# EAGLE board Motor Driver 6 Element (EAGLE 6.0)
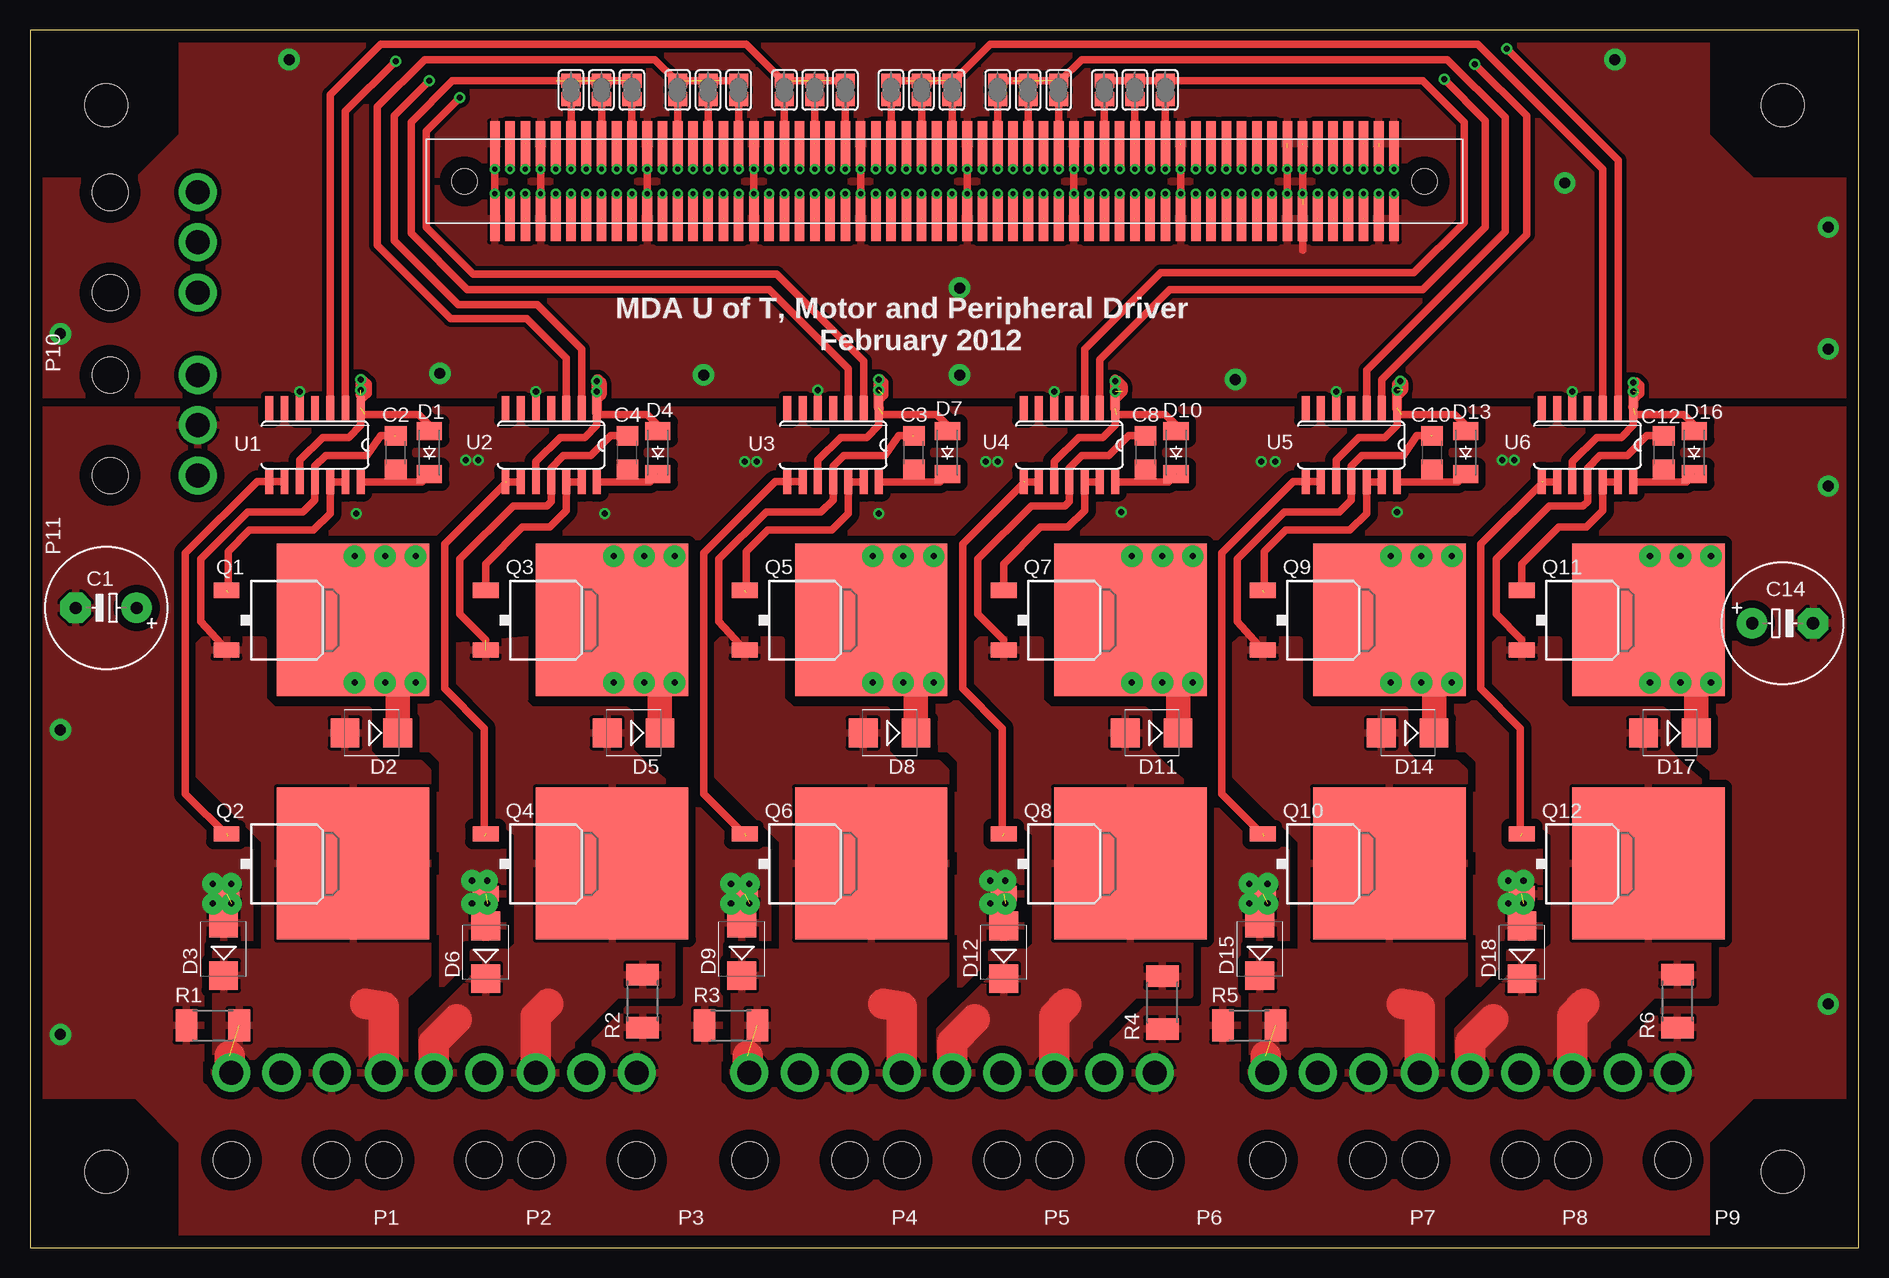
[diagram p0: board, top side]
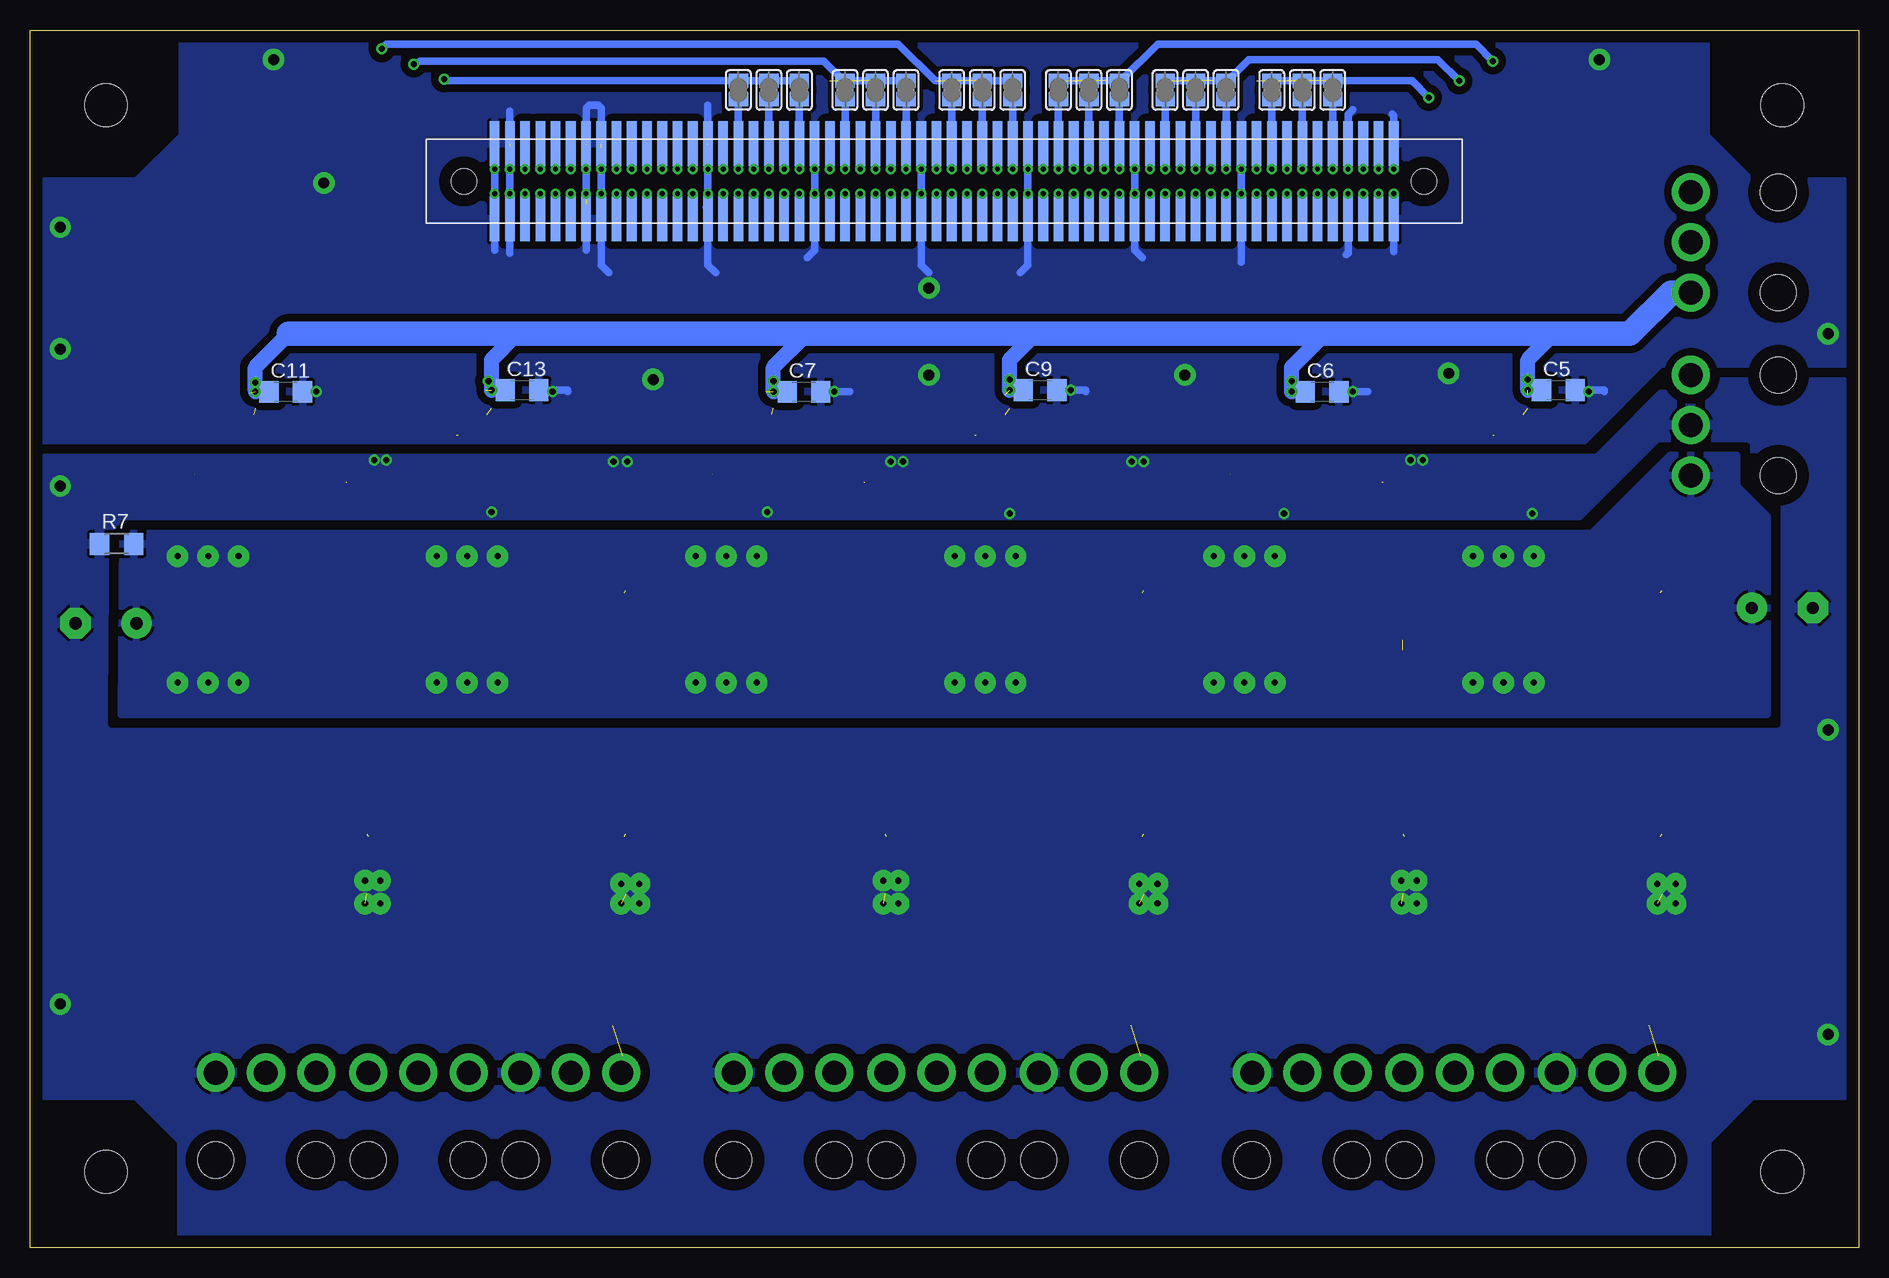
[diagram p1: board, bottom side, seen from below]

Size 152.38 x 101.52 mm. Coordinates in mm from the lower left corner, seen from the top.
Outline: 0,0 152.38,0 152.38,101.52 0,101.52 0,0
Copper layers (1*16): Top 0.035mm / dielectric 1.5mm / Bottom 0.035mm
Design rules: minimum track width 10mil, minimum drill 24mil, track to track 8mil, track to pad 8mil, pad to pad 8mil, via to via 8mil, smd to smd 12mil, copper to edge 40mil, drill to drill 8mil, minimum pad ring 10mil, minimum via ring 8mil, stop-mask expansion 4mil, vias tented up to drill 0mil, thermal gap 10mil
Holes 3.56 mm at 6.35,6.35 6.35,95.25 146.05,95.25 146.05,6.35

## Footprints (pad centres in the part's own frame; a part is rotated, then mirrored left to right if it is on the bottom)
E5-10,5 = drill 1.016 pad 2.54: + -2.54,0 | drill 1.016 pad 2.54 octagon: - 2.54,0
C1206 = smd 1.6 x 1.8: 1 -1.4,0; 2 1.4,0
C1206@1 = smd 1.6 x 1.8: 1 -1.4,0; 2 1.4,0
SOD-123_MINI-SMA = smd 1.5 x 2.1: A 1.8,0; C -1.8,0
SMB = smd 2.4 x 2.4: A 2.2,0; C -2.2,0
STACK-CONN-WIDEPITCH = smd 0.8 x 3.75: A1 37.465,-3.125; A2 36.195,-3.125; A3 34.925,-3.125; A4 33.655,-3.125; A5 32.385,-3.125; A6 31.115,-3.125; A7 29.845,-3.125; A8 28.575,-3.125; A9 27.305,-3.125; A10 26.035,-3.125; A11 24.765,-3.125; A12 23.495,-3.125; A13 22.225,-3.125; A14 20.955,-3.125; A15 19.685,-3.125; A16 18.415,-3.125; A17 17.145,-3.125; A18 15.875,-3.125; A19 14.605,-3.125; A20 13.335,-3.125; A21 12.065,-3.125; A22 10.795,-3.125; A23 9.525,-3.125; A24 8.255,-3.125; A25 6.985,-3.125; A26 5.715,-3.125; A27 4.445,-3.125; A28 3.175,-3.125; A29 1.905,-3.125; A30 0.635,-3.125; A31 -0.635,-3.125; A32 -1.905,-3.125; A33 -3.175,-3.125; A34 -4.445,-3.125; A35 -5.715,-3.125; A36 -6.985,-3.125; A37 -8.255,-3.125; A38 -9.525,-3.125; A39 -10.795,-3.125; A40 -12.065,-3.125; A41 -13.335,-3.125; A42 -14.605,-3.125; A43 -15.875,-3.125; A44 -17.145,-3.125; A45 -18.415,-3.125; A46 -19.685,-3.125; A47 -20.955,-3.125; A48 -22.225,-3.125; A49 -23.495,-3.125; A50 -24.765,-3.125; A51 -26.035,-3.125; A52 -27.305,-3.125; A53 -28.575,-3.125; A54 -29.845,-3.125; A55 -31.115,-3.125; A56 -32.385,-3.125; A57 -33.655,-3.125; A58 -34.925,-3.125; A59 -36.195,-3.125; A60 -37.465,-3.125; B1 37.465,3.125; B2 36.195,3.125; B3 34.925,3.125; B4 33.655,3.125; B5 32.385,3.125; B6 31.115,3.125; B7 29.845,3.125; B8 28.575,3.125; B9 27.305,3.125; B10 26.035,3.125; B11 24.765,3.125; B12 23.495,3.125; B13 22.225,3.125; B14 20.955,3.125; B15 19.685,3.125; B16 18.415,3.125; B17 17.145,3.125; B18 15.875,3.125; B19 14.605,3.125; B20 13.335,3.125; B21 12.065,3.125; B22 10.795,3.125; B23 9.525,3.125; B24 8.255,3.125; B25 6.985,3.125; B26 5.715,3.125; B27 4.445,3.125; B28 3.175,3.125; B29 1.905,3.125; B30 0.635,3.125; B31 -0.635,3.125; B32 -1.905,3.125; B33 -3.175,3.125; B34 -4.445,3.125; B35 -5.715,3.125; B36 -6.985,3.125; B37 -8.255,3.125; B38 -9.525,3.125; B39 -10.795,3.125; B40 -12.065,3.125; B41 -13.335,3.125; B42 -14.605,3.125; B43 -15.875,3.125; B44 -17.145,3.125; B45 -18.415,3.125; B46 -19.685,3.125; B47 -20.955,3.125; B48 -22.225,3.125; B49 -23.495,3.125; B50 -24.765,3.125; B51 -26.035,3.125; B52 -27.305,3.125; B53 -28.575,3.125; B54 -29.845,3.125; B55 -31.115,3.125; B56 -32.385,3.125; B57 -33.655,3.125; B58 -34.925,3.125; B59 -36.195,3.125; B60 -37.465,3.125 | hole 2.1: -40,0; 40,0
3CKT_MINIFIT_JR = drill 2 pad 3.175: 1 -4.191,0; 2 0,0; 3 4.191,0 | hole 2.997: -4.166,-7.29; 4.191,-7.29
D-PAK_TO252AA = smd 1.27 x 2.159: 1 -2.489,-4.199; 3 2.489,-4.199 | smd 12.7 x 12.7: 4 -0.04,6.35
R2010 = smd 1.8 x 2.7: 1 -2.2,0; 2 2.2,0
R1206 = smd 1.6 x 1.803: 1 -1.422,0; 2 1.422,0
SJ = smd 1.168 x 1.6: 1 -0.762,0; 2 0.762,0
SOIC14 = smd 0.66 x 2.032: 1 -3.81,-3.073; 2 -2.54,-3.073; 3 -1.27,-3.073; 4 0,-3.073; 5 1.27,-3.073; 6 2.54,-3.073; 7 3.81,-3.073; 8 3.81,3.073; 9 2.54,3.073; 10 1.27,3.073; 11 0,3.073; 12 -1.27,3.073; 13 -2.54,3.073; 14 -3.81,3.073

## Placement (x,y rotation side)
C1  >100uF  [E5-10,5]  6.35,53.34 180 top
C2  1uF  [C1206]  30.48,66.29 90 top
C3  1uF  [C1206]  73.66,66.29 90 top
C4  1uF  [C1206]  49.78,66.29 90 top
C5  10uF  [C1206@1]  25.02,71.5 0 bottom
C6  10uF  [C1206@1]  44.7,71.37 0 bottom
C7  10uF  [C1206@1]  87.88,71.37 0 bottom
C8  1uF  [C1206]  92.96,66.29 90 top
C9  10uF  [C1206@1]  68.2,71.5 0 bottom
C10  1uF  [C1206]  116.84,66.29 90 top
C11  10uF  [C1206@1]  131.06,71.37 0 bottom
C12  1uF  [C1206]  136.14,66.29 90 top
C13  10uF  [C1206@1]  111.38,71.5 0 bottom
C14  >100uF  [E5-10,5]  146.05,52.07 0 top
D1  CGRM4001-G  [SOD-123_MINI-SMA]  33.27,66.29 90 top
D2  [SMB]  28.45,42.93 180 top
D3  [SMB]  16.13,24.89 90 top
D4  CGRM4001-G  [SOD-123_MINI-SMA]  52.32,66.29 90 top
D5  [SMB]  50.29,42.93 180 top
D6  [SMB]  37.97,24.64 90 top
D7  CGRM4001-G  [SOD-123_MINI-SMA]  76.45,66.29 90 top
D8  [SMB]  71.63,42.93 180 top
D9  [SMB]  59.31,24.89 90 top
D10  CGRM4001-G  [SOD-123_MINI-SMA]  95.5,66.29 90 top
D11  [SMB]  93.47,42.93 180 top
D12  [SMB]  81.15,24.64 90 top
D13  CGRM4001-G  [SOD-123_MINI-SMA]  119.63,66.29 90 top
D14  [SMB]  114.81,42.93 180 top
D15  [SMB]  102.49,24.89 90 top
D16  CGRM4001-G  [SOD-123_MINI-SMA]  138.68,66.29 90 top
D17  [SMB]  136.65,42.93 180 top
D18  [SMB]  124.33,24.64 90 top
E$1  [STACK-CONN-WIDEPITCH]  76.2,88.9 0 top
E$2  [STACK-CONN-WIDEPITCH]  76.2,88.9 0 bottom
P1  MOLEX_MINIFIT_JR_3CKT  [3CKT_MINIFIT_JR]  20.95,14.61 0 top
P2  MOLEX_MINIFIT_JR_3CKT  [3CKT_MINIFIT_JR]  33.66,14.61 0 top
P3  MOLEX_MINIFIT_JR_3CKT  [3CKT_MINIFIT_JR]  46.35,14.61 0 top
P4  MOLEX_MINIFIT_JR_3CKT  [3CKT_MINIFIT_JR]  64.14,14.61 0 top
P5  MOLEX_MINIFIT_JR_3CKT  [3CKT_MINIFIT_JR]  76.83,14.61 0 top
P6  MOLEX_MINIFIT_JR_3CKT  [3CKT_MINIFIT_JR]  89.53,14.61 0 top
P7  MOLEX_MINIFIT_JR_3CKT  [3CKT_MINIFIT_JR]  107.31,14.61 0 top
P8  MOLEX_MINIFIT_JR_3CKT  [3CKT_MINIFIT_JR]  120.02,14.61 0 top
P9  MOLEX_MINIFIT_JR_3CKT  [3CKT_MINIFIT_JR]  132.72,14.61 0 top
P10  MOLEX_MINIFIT_JR_3CKT  [3CKT_MINIFIT_JR]  13.97,83.82 270 top
P11  MOLEX_MINIFIT_JR_3CKT  [3CKT_MINIFIT_JR]  13.97,68.58 270 top
Q1  IPB70N04S3  [D-PAK_TO252AA]  20.57,52.32 270 top
Q2  IPB70N04S3  [D-PAK_TO252AA]  20.57,32 270 top
Q3  IPB70N04S3  [D-PAK_TO252AA]  42.16,52.32 270 top
Q4  IPB70N04S3  [D-PAK_TO252AA]  42.16,32 270 top
Q5  IPB70N04S3  [D-PAK_TO252AA]  63.75,52.32 270 top
Q6  IPB70N04S3  [D-PAK_TO252AA]  63.75,32 270 top
Q7  IPB70N04S3  [D-PAK_TO252AA]  85.34,52.32 270 top
Q8  IPB70N04S3  [D-PAK_TO252AA]  85.34,32 270 top
Q9  IPB70N04S3  [D-PAK_TO252AA]  106.93,52.32 270 top
Q10  IPB70N04S3  [D-PAK_TO252AA]  106.93,32 270 top
Q11  IPB70N04S3  [D-PAK_TO252AA]  128.52,52.32 270 top
Q12  IPB70N04S3  [D-PAK_TO252AA]  128.52,32 270 top
R1  1.5k  [R2010]  15.24,18.54 0 top
R2  1.5k  [R2010]  51.05,20.57 90 top
R3  1.5k  [R2010]  58.42,18.54 0 top
R4  1.5k  [R2010]  94.36,20.45 90 top
R5  1.5k  [R2010]  101.6,18.54 0 top
R6  1.5k  [R2010]  137.29,20.57 90 top
R7  [R1206]  145.16,58.67 0 bottom
SJ1  [SJ]  61.59,96.52 90 bottom
SJ2  [SJ]  43.81,96.52 90 bottom
SJ3  [SJ]  46.35,96.52 90 bottom
SJ4  [SJ]  48.9,96.52 90 bottom
SJ5  [SJ]  50.16,96.52 90 top
SJ6  [SJ]  47.62,96.52 90 top
SJ7  [SJ]  45.09,96.52 90 top
SJ8  [SJ]  64.14,96.52 90 bottom
SJ9  [SJ]  52.7,96.52 90 bottom
SJ10  [SJ]  55.24,96.52 90 bottom
SJ11  [SJ]  57.78,96.52 90 bottom
SJ12  [SJ]  59.05,96.52 90 top
SJ13  [SJ]  56.52,96.52 90 top
SJ14  [SJ]  53.98,96.52 90 top
SJ15  [SJ]  66.67,96.52 90 bottom
SJ16  [SJ]  67.94,96.52 90 top
SJ17  [SJ]  65.41,96.52 90 top
SJ18  [SJ]  62.87,96.52 90 top
SJ19  [SJ]  90.81,96.52 90 bottom
SJ21  [SJ]  88.27,96.52 90 bottom
SJ22  [SJ]  94.61,96.52 90 top
SJ23  [SJ]  92.08,96.52 90 top
SJ24  [SJ]  89.53,96.52 90 top
SJ25  [SJ]  85.72,96.52 90 top
SJ26  [SJ]  83.19,96.52 90 top
SJ27  [SJ]  80.64,96.52 90 top
SJ28  [SJ]  79.38,96.52 90 bottom
SJ29  [SJ]  81.92,96.52 90 bottom
SJ30  [SJ]  84.45,96.52 90 bottom
SJ31  [SJ]  76.83,96.52 90 top
SJ32  [SJ]  74.3,96.52 90 top
SJ33  [SJ]  71.75,96.52 90 top
SJ34  [SJ]  70.48,96.52 90 bottom
SJ35  [SJ]  73.03,96.52 90 bottom
SJ36  [SJ]  75.56,96.52 90 bottom
SJ37  [SJ]  93.34,96.52 90 bottom
U1  LT1160CS  [SOIC14]  23.75,66.93 180 top
U2  LT1160CS  [SOIC14]  43.43,66.93 180 top
U3  LT1160CS  [SOIC14]  66.93,66.93 180 top
U4  LT1160CS  [SOIC14]  86.61,66.93 180 top
U5  LT1160CS  [SOIC14]  110.11,66.93 180 top
U6  LT1160CS  [SOIC14]  129.79,66.93 180 top

## Library data of the parts
C1-C4 C8 C10 C12 C14 R1-R7 = rcl
C5-C7 C9 C11 C13 = resistor
D1-D18 = diode
E$1 E$2 = interface (2)
P1-P11 Q1-Q12 U1-U6 = Motor Driver Custom
SJ1-SJ19 SJ21-SJ37 = jumper

## Nets
+12V: C5.1 C6.1 C7.1 C9.1 C11.1 C13.1 D1.A D4.A D7.A D10.A D13.A D16.A P10.3 U1.1 U1.10 U2.1 U2.10 U3.1 U3.10 U4.1 U4.10 U5.1 U5.10 U6.1 U6.10
+24V: C1.+ C14.+ P11.3 R7.2
AGND: C1.- C14.- D3.A D6.A D9.A D12.A D15.A D18.A P1.3 P3.3 P4.3 P6.3 P7.3 P9.3 P11.2 Q2.3 Q4.3 Q6.3 Q8.3 Q10.3 Q12.3 R1.1 R2.1 R3.1 R4.1 R5.1 R6.1 R7.1 U1.6 U2.6 U3.6 U4.6 U5.6 U6.6
GND: C5.2 C6.2 C7.2 C9.2 C11.2 C13.2 E$1.A1 E$1.A2 E$1.A7 E$1.A8 E$1.A15 E$1.A22 E$1.A29 E$1.A36 E$1.A43 E$1.A50 E$1.A57 E$1.A60 E$1.B1 E$1.B2 E$1.B7 E$1.B8 E$1.B15 E$1.B22 E$1.B29 E$1.B36 E$1.B43 E$1.B50 E$1.B57 E$1.B60 E$2.A1 E$2.A4 E$2.A11 E$2.A18 E$2.A25 E$2.A32 E$2.A39 E$2.A46 E$2.A53 E$2.A54 E$2.A60 E$2.B1 E$2.B4 E$2.B11 E$2.B18 E$2.B25 E$2.B32 E$2.B39 E$2.B46 E$2.B53 E$2.B54 E$2.B59 E$2.B60 U1.5 U2.5 U3.5 U4.5 U5.5 U6.5
N$1: C2.1 D1.C U1.14
N$2: SJ5.2 SJ6.2 SJ7.2 U3.3
N$3: C3.1 D7.C U3.14
N$5: SJ2.2 SJ3.2 SJ4.2 U3.2
N$6: SJ17.2 SJ18.2 U1.3
N$7: P4.2
N$8: P1.2
N$9: Q1.1 U1.12 U1.13
N$10: Q5.1 U3.12 U3.13
N$11: C8.1 D10.C U4.14
N$12: Q8.1 U4.8 U4.9
N$13: SJ21.2 U4.2
N$14: SJ22.2 SJ23.2 SJ24.2 U4.3
N$15: P6.2
N$16: Q7.1 U4.12 U4.13
N$19: C10.1 D13.C U5.14
N$21: SJ25.2 SJ26.2 SJ27.2 U5.3
N$22: P7.2
N$23: Q9.1 U5.12 U5.13
N$24: C12.1 D16.C U6.14
N$25: Q12.1 U6.8 U6.9
N$27: SJ31.2 SJ32.2 U6.3
N$28: P9.2
N$29: Q11.1 U6.12 U6.13
N$111: C4.1 D4.C U2.14
N$113: Q4.1 U2.8 U2.9
N$114: SJ9.2 SJ10.2 U2.2
N$115: SJ12.2 SJ13.2 SJ14.2 U2.3
N$117: P3.2
N$118: Q3.1 U2.12 U2.13
N$120: SJ1.2 SJ8.2 SJ15.2 U1.2
OUTA: C2.2 D2.A D3.C P1.1 P2.1 Q1.3 Q2.4 R1.2 U1.11
OUTA1: C3.2 D8.A D9.C P4.1 P5.1 Q5.3 Q6.4 R3.2 U3.11
OUTA2: C10.2 D14.A D15.C P7.1 P8.1 Q9.3 Q10.4 R5.2 U5.11
OUTB: C4.2 D5.A D6.C P2.2 P3.1 Q3.3 Q4.4 R2.2 U2.11
OUTB1: C8.2 D11.A D12.C P5.2 P6.1 Q7.3 Q8.4 R4.2 U4.11
OUTB2: C12.2 D17.A D18.C P8.2 P9.1 Q11.3 Q12.4 R6.2 U6.11
S$1: Q3.4
S$2: D5.C
S$3: D2.C
S$4: Q1.4
S$5: E$1.B55 E$2.B6 SJ7.1
S$6: Q2.1 U1.8 U1.9
S$7: Q7.4
S$8: D11.C
S$9: D8.C
S$10: Q5.4
S$11: Q6.1 U3.8 U3.9
S$12: E$1.B53 E$2.B8 SJ6.1
S$13: Q11.4
S$14: D17.C
S$15: D14.C
S$16: Q9.4
S$17: Q10.1 U5.8 U5.9
S$18: E$1.B51 E$2.B10 SJ5.1
S$19: E$1.B48 E$2.B13 SJ14.1
S$20: E$1.B46 E$2.B15 SJ13.1
S$21: E$1.B44 E$2.B17 SJ12.1
S$22: E$1.B41 E$2.B20 SJ18.1
S$23: E$1.B39 E$2.B22 SJ17.1
S$24: E$1.B37 E$2.B24
S$25: E$1.B34 E$2.B27 SJ33.1
S$26: E$1.B32 E$2.B29 SJ32.1
S$27: E$1.B30 E$2.B31 SJ31.1
S$28: E$1.B27 E$2.B34 SJ27.1
S$29: E$1.B25 E$2.B36 SJ26.1
S$30: E$1.B23 E$2.B38 SJ25.1
S$31: E$1.B20 E$2.B41 SJ24.1
S$32: E$1.B18 E$2.B43 SJ23.1
S$33: E$1.B16 E$2.B45 SJ22.1
S$34: E$1.B21 E$2.B40 SJ21.1
S$35: E$1.B19 E$2.B42 SJ19.1
S$36: E$1.B17 E$2.B44 SJ37.1
S$37: E$1.B24 E$2.B37 SJ30.1
S$38: E$1.B26 E$2.B35 SJ29.1
S$39: E$1.B28 E$2.B33 SJ28.1
S$40: E$1.B31 E$2.B30 SJ36.1
S$41: E$1.B33 E$2.B28 SJ35.1
S$42: E$1.B35 E$2.B26 SJ34.1
S$43: E$1.B38 E$2.B23 SJ15.1
S$44: E$1.B40 E$2.B21 SJ8.1
S$45: E$1.B42 E$2.B19 SJ1.1
S$46: E$1.B49 E$2.B12 SJ9.1
S$47: E$1.B47 E$2.B14 SJ10.1
S$48: E$1.B45 E$2.B16 SJ11.1
S$49: E$1.B52 E$2.B9 SJ4.1
S$50: E$1.B54 E$2.B7 SJ3.1
S$51: E$1.B56 E$2.B5 SJ2.1
S$53: SJ34.2 SJ35.2 SJ36.2 U6.2
S$54: SJ28.2 SJ29.2 SJ30.2 U5.2
S$57: E$1.A59 E$2.A2
S$58: E$1.A58 E$2.A3
S$60: E$1.A55 E$2.A6
S$61: E$1.A56 E$2.A5
S$62: E$1.A54 E$2.A7
S$63: E$1.A53 E$2.A8
S$64: E$1.A52 E$2.A9
S$65: E$1.A51 E$2.A10
S$67: E$1.A49 E$2.A12
S$68: E$1.A48 E$2.A13
S$69: E$1.A47 E$2.A14
S$70: E$1.A46 E$2.A15
S$71: E$1.A45 E$2.A16
S$72: E$1.A44 E$2.A17
S$74: E$1.A42 E$2.A19
S$75: E$1.A41 E$2.A20
S$76: E$1.A40 E$2.A21
S$77: E$1.A38 E$2.A23
S$78: E$1.A39 E$2.A22
S$79: E$1.A37 E$2.A24
S$81: E$1.A34 E$2.A27
S$82: E$1.A35 E$2.A26
S$83: E$1.A33 E$2.A28
S$84: E$1.A32 E$2.A29
S$85: E$1.A31 E$2.A30
S$86: E$1.A30 E$2.A31
S$88: E$1.A28 E$2.A33
S$89: E$1.A27 E$2.A34
S$90: E$1.A25 E$2.A36
S$91: E$1.A26 E$2.A35
S$92: E$1.A23 E$2.A38
S$93: E$1.A24 E$2.A37
S$95: E$1.A20 E$2.A41
S$96: E$1.A21 E$2.A40
S$97: E$1.A19 E$2.A42
S$98: E$1.A18 E$2.A43
S$99: E$1.A16 E$2.A45
S$100: E$1.A17 E$2.A44
S$102: E$1.A14 E$2.A47
S$103: E$1.A13 E$2.A48
S$104: E$1.A11 E$2.A50
S$105: E$1.A12 E$2.A49
S$106: E$1.A10 E$2.A51
S$107: E$1.A9 E$2.A52
S$109: E$1.A6 E$2.A55
S$111: E$1.A4 E$2.A57
S$112: E$1.A5 E$2.A56
S$113: E$1.A3 E$2.A58
S$117: E$1.B59 E$2.B2
S$119: E$1.B58 E$2.B3
S$126: E$1.B13 E$2.B48
S$127: E$1.B14 E$2.B47
S$128: E$1.B11 E$2.B50
S$129: E$1.B12 E$2.B49
S$130: E$1.B10 E$2.B51
S$132: E$1.B9 E$2.B52
S$133: E$1.B6 E$2.B55
S$135: E$1.B5 E$2.B56
S$136: E$1.B4 E$2.B57
S$137: E$1.B3 E$2.B58

## Tracks (layer width: path | path; a pad name or v marks a point on that pad's centre or on a via)
+12V  (11 unrouted)
  Top 0.61: 47.24,71.37 U2.1 47.24,68.58 46.23,67.56 44.2,67.56 42.16,65.53 U2.10 | D4.A 52.32,68.58 51.44,69.47 47.37,69.47 | D1.A 33.27,68.58 32.38,69.47 27.94,69.47 | 27.56,71.5 U1.1 27.56,68.58 26.54,67.56 24.38,67.56 22.48,65.66 U1.10 | D7.A 76.45,68.58 75.56,69.47 71.12,69.47 | U3.1 70.74,68.58 69.72,67.56 67.56,67.56 65.66,65.66 U3.10 | 90.42,71.37 U4.1 90.42,68.58 89.41,67.56 87.38,67.56 85.34,65.53 U4.10 | D10.A 95.5,68.58 94.61,69.47 90.55,69.47 | D13.A 119.63,68.58 118.75,69.47 114.3,69.47 | U5.1 113.92,68.58 112.9,67.56 110.74,67.56 108.84,65.66 U5.10 | 133.6,71.37 U6.1 133.6,68.58 132.59,67.56 130.56,67.56 128.52,65.53 U6.10 | D16.A 138.68,68.58 137.79,69.47 133.73,69.47
  Top 0.813: U3.1 70.74,72.39 70.87,72.39 71.12,72.14 71.12,71.12 70.87,70.87 | U4.1 90.42,72.39 | U5.1 113.92,70.99 | 113.92,70.99 113.92,72.01 | 47.37,69.47 47.24,69.6 47.24,71.37 47.24,72.39 47.37,72.39 47.62,72.14 47.62,71.12 47.37,70.87 | 113.92,72.01 114.17,72.26 | 113.92,72.01 114.3,72.01 114.43,72.14 114.43,71.5 113.92,70.99 | 27.56,71.5 27.56,72.39 27.69,72.39 28.07,72.01 28.07,71.25 27.69,70.87
  Bottom 0.61: C6.1 47.24,71.37 | C5.1 27.56,71.5 | C9.1 70.74,71.5 | C7.1 90.42,71.37 | C13.1 113.92,71.5 | C11.1 133.6,71.37
  Bottom 1.27: 133.6,71.37 133.6,73.41 130.81,76.2 | 90.42,71.37 90.42,73.41 87.63,76.2 | 113.92,71.5 113.92,74.04 111.76,76.2 | 70.74,71.5 70.74,74.04 68.58,76.2 | 47.24,71.37 47.24,73.41 44.45,76.2 | 27.56,71.5 27.56,74.04 25.4,76.2
  Bottom 2.032: P10.3 15.62,79.63 19.05,76.2 25.4,76.2 44.45,76.2 68.58,76.2 87.63,76.2 111.76,76.2 130.81,76.2
+24V  (via drill 0.51 pad 1.78)
  other vias: 27.05,47.12 29.59,47.12 32.13,47.12 27.05,57.66 29.59,57.66 32.13,57.66 48.64,47.12 51.18,47.12 53.72,47.12 48.64,57.66 51.18,57.66 53.72,57.66 70.23,47.12 72.77,47.12 75.31,47.12 70.23,57.66 72.77,57.66 75.31,57.66 91.82,47.12 94.36,47.12 96.9,47.12 91.82,57.66 94.36,57.66 96.9,57.66 113.41,47.12 115.95,47.12 118.49,47.12 113.41,57.66 115.95,57.66 118.49,57.66 135,47.12 137.54,47.12 140.08,47.12 135,57.66 137.54,57.66 140.08,57.66
  pour Bottom (isolate 0.254): 7.62,44.45 7.62,60.96 10.16,63.5 10.16,66.04 15.75,66.04 22.23,59.56 144.65,59.56 144.78,44.45
AGND  (via drill 0.51 pad 0.91, 0.51 pad 1.78, 0.91 pad 1.78)  (6 unrouted)
  other vias: 2.54,17.78 16.76,28.7 15.24,28.7 15.24,30.35 16.76,30.35 2.54,43.18 38.1,28.7 36.83,28.7 36.83,30.61 38.1,30.61 59.94,28.7 27.18,61.21 58.42,28.7 58.42,30.35 59.94,30.35 37.34,65.66 36.32,65.66 81.28,28.7 47.88,61.21 80.01,28.7 80.01,30.61 81.28,30.61 59.56,65.53 60.58,65.53 103.12,28.7 70.74,61.21 101.6,28.7 101.6,30.35 103.12,30.35 79.63,65.53 80.64,65.53 124.46,28.7 90.93,61.34 123.19,28.7 123.19,30.61 124.46,30.61 102.62,65.53 103.76,65.53 149.86,20.32 113.92,61.34 123.7,65.66 122.68,65.66 149.86,63.5
  pour Bottom (isolate 0.813, rank 2): 12.7,0 139.7,0 139.7,8.89 143.51,12.7 152.4,12.7 152.4,66.04 22.86,67.31 13.97,73.66 0,73.66 0,12.7 8.89,12.7 12.7,8.89
  pour Top (isolate 0.635, rank 2): 0,69.85 152.4,69.85 152.4,12.7 143.51,12.7 139.7,8.89 139.7,0 12.7,0 12.7,8.89 8.89,12.7 0,12.7
GND  (via drill 0.51 pad 0.91, 0.91 pad 1.78)  (9 unrouted)
  Top 0.61: E$2.A11 E$2.B11 | E$2.A18 E$2.B18 | E$2.A25 E$2.B25 | E$2.A32 E$2.B32 | E$2.A39 E$2.B39 | E$2.A46 E$2.B46 | E$2.A53 E$2.B53 | E$2.B4 E$2.A4 | E$2.B1 E$2.A1 | 106.05,84.71 106.05,83.19 | 106.05,90.93 106.05,87.38 | U1.5 v22.48,71.37 | U2.5 v42.16,71.37 | U3.5 v65.66,71.5 | U4.5 v85.34,71.37 | U5.5 v108.84,71.37 | U6.5 128.52,71.25
  Bottom 0.61: 38.73,83.06 38.73,85.09 | E$2.A11 51.44,82.17 | E$2.A18 60.33,83.19 59.69,82.55 | 69.85,81.28 69.22,81.92 E$2.A25 E$2.B25 | E$2.A32 78.11,81.92 77.47,81.28 | 87.63,82.55 87,83.19 E$2.A39 E$2.B39 | E$2.A46 95.89,81.92 95.25,81.28 | E$2.A53 104.78,81.92 104.14,81.28 | E$2.B54 106.05,95 105.79,95.25 105.03,95.25 104.78,95 104.78,92.2 | E$2.B46 95.89,95.25 | 112.39,85.85 112.39,82.93 | 112.39,92.08 112.39,94.74 | 113.79,84.96 113.67,84.84 113.67,83.19 | E$2.A4 42.55,82.93 42.67,82.8 | E$2.B4 42.55,94.49 42.16,94.87 | E$2.B1 38.73,94.36 38.86,94.49 | 106.05,84.96 106.05,83.19 | E$2.B18 60.33,86.61 | E$2.B32 78.11,86.61 | 113.67,91.31 113.67,86.11 | 106.05,91.95 106.05,87 | 112.39,91.82 112.39,86.49 | 104.78,91.69 104.78,86.36 | 95.89,91.95 95.89,86.87 96.01,86.74 | C5.2 21.21,71.5 21.21,71.37 | C6.2 40.89,71.37 | C9.2 64.39,71.5 64.39,71.37 | C7.2 84.07,71.37 | C13.2 107.57,71.5 107.57,71.37
  other vias: 128.52,71.37 2.54,76.2 21.59,99.06 77.47,80.01 149.86,74.93 149.86,85.09 132.08,99.06 127.89,88.77 100.46,72.39 77.47,72.77 56.13,72.77 34.16,72.9
  pour Bottom (isolate 0.635): 0,88.9 0,73.66 16.51,73.66 22.86,67.31 152.4,67.31 152.4,88.9 143.51,88.9 139.7,92.71 139.7,101.6 12.7,101.6 12.7,92.71 8.89,88.9
  pour Top (isolate 0.381): 139.7,101.6 139.7,92.71 142.24,90.17 143.51,88.9 152.4,88.9 152.4,71.12 0,71.12 0,88.9 8.89,88.9 12.7,92.71 12.7,101.6
N$1
  Top 0.61: U1.14 30.48,63.86 | 30.48,63.86 32.64,63.86 D1.C | C2.1 30.48,63.86
N$2  (2 unrouted)
  Top 0.61: U3.3 68.2,73.28 61.59,79.88 36.45,79.88 31.75,84.58 31.75,93.85 35.18,97.28 SJ5.2
N$3
  Top 0.61: U3.14 73.66,63.86 | 73.66,63.86 75.82,63.86 D7.C | C3.1 73.66,63.86
N$5  (via drill 0.51 pad 0.91)  (2 unrouted)
  Top 0.61: U3.2 69.47,73.91 62.23,81.15 36.96,81.15 33.02,85.09 33.02,93.09 v35.81,95.89
  Bottom 0.61: SJ4.2 37.21,97.28 v35.81,95.89
N$6  (2 unrouted)
  Top 0.61: 67.94,97.28 62.74,97.28 59.69,100.33 29.21,100.33 25.02,96.14 U1.3
N$9  (1 unrouted)
  Top 0.61: 16.51,54.61 16.51,58.04 18.29,59.82 23.62,59.82 25.02,61.21 U1.12 U1.13 26.29,63.75
N$10  (1 unrouted)
  Top 0.61: 59.69,54.61 59.69,58.04 61.47,59.82 66.8,59.82 68.2,61.21 U3.12 U3.13 69.47,63.75
N$11  (1 unrouted)
  Top 0.61: U4.14 92.96,63.86 | 92.96,63.86 94.84,63.86 95.5,64.52 | C8.1 92.96,63.86
N$12  (2 unrouted)
  Top 0.61: U4.9 82.91,63.86 77.72,58.67 77.72,46.61 81.03,43.31 81.03,34.29
N$13  (via drill 0.51 pad 0.91)
  Top 0.61: U4.2 89.15,74.04 95,79.88 116.08,79.88 121.28,85.09 121.28,93.98 v117.86,97.41
  Bottom 0.61: SJ21.2 117.73,97.28 v117.86,97.41
N$14
  Top 0.61: U4.3 87.88,74.93 94.23,81.28 115.32,81.28 119.51,85.47 119.51,93.85 116.08,97.28 SJ22.2 SJ23.2 SJ24.2
N$16
  Top 0.61: U4.13 U4.12 87.88,61.47 86.49,60.07 84.2,60.07 81.15,57.02 81.15,54.63 Q7.1
N$17  (via drill 0.51 pad 0.91)
  Top 0.61: v70.74,71.5 v70.74,72.39
N$18  (via drill 0.51 pad 0.91)  (1 unrouted)
  Top 0.813: v90.42,72.26 90.68,72.26 91.06,71.88 91.06,71.37 90.42,70.74
  other vias: 90.42,71.37
N$19
  Top 0.61: U5.14 116.84,63.86 | 116.84,63.86 119,63.86 D13.C | C10.1 116.84,63.86
N$21  (1 unrouted)
  Top 0.61: U5.3 111.38,73.15 122.94,84.71 122.94,94.23 118.11,99.06 87.63,99.06 85.85,97.28 SJ25.2 SJ27.2
N$23  (1 unrouted)
  Top 0.61: 102.87,54.61 102.87,58.04 104.65,59.82 109.98,59.82 111.38,61.21 U5.12 U5.13 112.65,63.75
N$24  (1 unrouted)
  Top 0.61: U6.14 136.14,63.86 | 136.14,63.86 138.02,63.86 138.68,64.52 | C12.1 136.14,63.86
N$25  (2 unrouted)
  Top 0.61: U6.9 126.09,63.86 120.9,58.67 120.9,46.61 124.21,43.31 124.21,34.29
N$27  (1 unrouted)
  Top 0.61: 71.88,97.28 SJ32.2 76.96,97.28 80.01,100.33 120.65,100.33 131.06,89.92 U6.3
N$29
  Top 0.61: U6.13 U6.12 131.06,61.47 129.67,60.07 127.38,60.07 124.33,57.02 124.33,54.63 Q11.1
N$30  (via drill 0.51 pad 0.91)
  Top 0.813: v114.17,72.26 114.17,71.75 v113.92,71.5
N$31  (via drill 0.51 pad 0.91)  (1 unrouted)
  Top 0.813: 133.6,70.1 v133.6,72.14 133.86,72.14 134.11,71.88 134.11,71.25 133.73,70.87
  other vias: 133.6,71.37
N$109  (via drill 0.51 pad 0.91)  (1 unrouted)
  Top 0.813: v27.56,72.39 27.56,71.12
  other vias: 27.56,71.5
N$110  (via drill 0.51 pad 0.91)
  Top 0.813: v47.24,72.26 v47.24,71.37
N$111  (1 unrouted)
  Top 0.61: U2.14 49.78,63.86 | 49.78,63.86 51.66,63.86 52.32,64.52 | C4.1 49.78,63.86
N$113  (2 unrouted)
  Top 0.61: U2.9 39.73,63.86 34.54,58.67 34.54,46.61 37.85,43.31 37.85,34.29
N$114  (2 unrouted)
  Top 0.61: U2.2 45.97,74.93 42.29,78.61 35.69,78.61 30.35,83.95 30.35,94.36 33.27,97.28
  Bottom 0.61: 57.66,97.28 SJ9.2 52.58,97.28 50.8,99.06 35.05,99.06 33.27,97.28
N$115  (2 unrouted)
  Top 0.61: SJ12.2 53.85,97.28 52.07,99.06 32.89,99.06 28.96,95.12 28.96,83.57 35.05,77.47 41.4,77.47 44.7,74.17 U2.3
N$118
  Top 0.61: U2.13 U2.12 44.7,61.47 43.31,60.07 41.02,60.07 37.97,57.02 37.97,54.63 Q3.1
N$120  (via drill 0.51 pad 0.91)  (1 unrouted)
  Top 0.61: v30.48,98.93 26.29,94.74 U1.2
  Bottom 0.61: SJ15.2 SJ1.2 61.47,97.28 58.42,100.33 31.88,100.33 v30.48,98.93
OUTA  (2 unrouted)
  Top 0.61: 30.48,67.56 30.35,67.69 29.21,67.69 28.07,66.04 24.64,66.04 23.75,65.15 U1.11 23.75,62.36 22.73,61.34 18.16,61.34 14.22,57.4 14.22,52.23 Q1.3
  Top 2.54: Q2.4 28.19,35.81 | 27.94,20.32 29.46,20.07 29.46,14.48 | 16.64,14.73 16.64,16
  pour Top (isolate 0.508): 19.43,50.67 14.48,50.67 13.97,50.16 13.97,39.5 19.56,33.91 19.56,24.64 15.49,24.64 15.49,16.26 15.37,14.61 17.53,14.61 17.53,14.86 19.68,17.02 25.15,17.02 26.04,16.13 26.04,13.84 29.59,13.84 31.24,13.97 31.24,20.95 33.15,22.73 33.15,39.75 32.51,40.39 29.08,40.39 28.19,41.27 28.19,44.83 20.32,44.83 19.43,45.72
OUTA1  (2 unrouted)
  Top 0.61: 73.66,67.56 73.53,67.69 72.39,67.69 71.25,66.04 67.82,66.04 66.93,65.15 U3.11 66.93,62.36 65.91,61.34 61.34,61.34 57.4,57.4 57.4,52.23 Q5.3
  Top 2.54: Q6.4 71.37,35.81 | 71.12,20.32 72.64,20.07 72.64,14.48 | 59.82,14.73 59.82,16
  pour Top (isolate 0.508): 62.61,50.67 57.66,50.67 57.15,50.16 57.15,39.5 62.74,33.91 62.74,24.64 58.67,24.64 58.67,16.26 58.55,14.61 60.71,14.61 60.71,14.86 62.87,17.02 68.33,17.02 69.22,16.13 69.22,13.84 72.77,13.84 74.42,13.97 74.42,20.95 76.33,22.73 76.33,39.75 75.69,40.39 72.26,40.39 71.37,41.27 71.37,44.83 63.5,44.83 62.61,45.72
OUTA2  (2 unrouted)
  Top 0.61: 116.84,67.56 116.71,67.69 115.57,67.69 114.43,66.04 111,66.04 110.11,65.15 U5.11 110.11,62.36 109.09,61.34 104.52,61.34 100.58,57.4 100.58,52.23 Q9.3
  Top 2.54: Q10.4 114.55,35.81 | 114.3,20.32 115.82,20.07 115.82,14.48 | 103,14.73 103,16
  pour Top (isolate 0.508): 105.79,50.67 100.84,50.67 100.33,50.16 100.33,39.5 105.92,33.91 105.92,24.64 101.85,24.64 101.85,16.26 101.73,14.61 103.89,14.61 103.89,14.86 106.05,17.02 111.51,17.02 112.39,16.13 112.39,13.84 115.95,13.84 117.6,13.97 117.6,20.95 119.51,22.73 119.51,39.75 118.87,40.39 115.44,40.39 114.55,41.27 114.55,44.83 106.68,44.83 105.79,45.72
OUTB  (1 unrouted)
  Top 0.61: C4.2 48.39,67.69 46.74,66.04 44.45,66.04 43.43,65.02 U2.11 43.43,62.23 43.05,61.85 40.26,61.85 35.81,57.4 35.81,52.83 37.97,50.67
  Top 2.54: Q4.4 48.47,34.54 | 33.78,14.73 P2.2 33.66,17.14 35.56,19.05 | 43.18,20.32 42.16,19.3 P3.1
  pour Top (isolate 0.635): 46.1,50.67 41.15,50.67 35.56,50.16 35.56,38.35 40.64,34.54 40.64,25.27 40.01,24.64 36.96,24.64 36.96,22.48 32.64,18.16 32.64,14.1 45.21,14.1 45.09,17.27 48.9,21.08 53.47,21.08 53.47,38.35 51.18,40.26 50.04,41.4 50.04,44.58 49.66,44.83 41.78,44.83 41.02,45.59
OUTB1
  Top 0.61: C8.2 91.57,67.69 89.92,66.04 87.63,66.04 86.61,65.02 U4.11 86.61,62.23 86.23,61.85 83.44,61.85 78.99,57.4 78.99,52.83 81.15,50.67
  Top 2.54: Q8.4 91.65,34.54 | 76.96,14.73 P5.2 76.83,17.14 78.74,19.05 | 86.36,20.32 85.34,19.3 P6.1
  pour Top (isolate 0.635): 84.2,50.67 79.25,50.67 78.74,50.16 78.74,38.35 83.82,34.54 83.82,25.27 83.19,24.64 80.14,24.64 80.14,22.48 75.82,18.16 75.82,14.1 88.39,14.1 88.27,17.27 92.08,21.08 96.65,21.08 96.65,38.35 94.36,40.26 93.22,41.4 93.22,44.58 92.84,44.83 84.96,44.83 84.2,45.59
OUTB2
  Top 0.61: C12.2 134.75,67.69 133.1,66.04 130.81,66.04 129.79,65.02 U6.11 129.79,62.23 129.41,61.85 126.62,61.85 122.17,57.4 122.17,52.83 124.33,50.67
  Top 2.54: Q12.4 134.83,34.54 | 120.14,14.73 P8.2 120.02,17.14 121.92,19.05 | 129.54,20.32 128.52,19.3 P9.1
  pour Top (isolate 0.635): 127.38,50.67 122.43,50.67 121.92,50.16 121.92,38.35 127,34.54 127,25.27 126.36,24.64 123.32,24.64 123.32,22.48 119,18.16 119,14.1 131.57,14.1 131.44,17.27 135.25,21.08 139.83,21.08 139.83,38.35 137.54,40.26 136.4,41.4 136.4,44.58 136.02,44.83 128.14,44.83 127.38,45.59
S$1
  Top 2.54: 47.37,48.26 Q3.4
S$2
  Top 2.032: 52.07,48.26 52.49,47.84 D5.C
S$3
  Top 2.032: D2.C 30.65,48.09
  Top 2.54: 30.65,48.09 30.48,48.26
S$5  (1 unrouted)
  Top 0.61: E$2.B6 SJ7.1
S$6  (1 unrouted)
  Top 0.61: U1.9 21.21,63.88 19.94,63.88 | U1.8 19.94,63.88 | 19.94,63.88 18.92,63.88 12.95,57.91 12.95,37.85 16.51,34.29
S$7
  Top 2.54: 90.55,48.26 Q7.4
S$8
  Top 2.032: 95.25,48.26 95.67,47.84 D11.C
S$9
  Top 2.032: D8.C 73.83,48.09
  Top 2.54: 73.83,48.09 73.66,48.26
S$11  (1 unrouted)
  Top 0.61: U3.9 64.39,63.88 63.12,63.88 | U3.8 63.12,63.88 | 63.12,63.88 62.1,63.88 56.13,57.91 56.13,37.85 59.69,34.29
S$12  (1 unrouted)
  Top 0.61: E$2.B8 SJ6.1
S$13
  Top 2.54: 133.73,48.26 Q11.4
S$14
  Top 2.032: 138.43,48.26 138.85,47.84 D17.C
S$15
  Top 2.032: D14.C 117.01,48.09
  Top 2.54: 117.01,48.09 116.84,48.26
S$17  (1 unrouted)
  Top 0.61: U5.9 107.57,63.88 106.3,63.88 | U5.8 106.3,63.88 | 106.3,63.88 105.28,63.88 99.31,57.91 99.31,37.85 102.87,34.29
S$18  (1 unrouted)
  Top 0.61: E$2.B10 SJ5.1
S$19  (1 unrouted)
  Top 0.61: E$2.B13 SJ14.1
S$20  (1 unrouted)
  Top 0.61: E$2.B15 SJ13.1
S$21  (1 unrouted)
  Top 0.61: E$2.B17 SJ12.1
S$22  (1 unrouted)
  Top 0.61: E$2.B20 SJ18.1
S$23  (1 unrouted)
  Top 0.61: E$2.B22 SJ17.1
S$24  (1 unrouted)
  Top 0.61: E$2.B24 67.94,95.76
S$25  (1 unrouted)
  Top 0.61: E$2.B27 SJ33.1
S$26  (1 unrouted)
  Top 0.61: E$2.B29 SJ32.1
S$27  (1 unrouted)
  Top 0.61: E$2.B31 SJ31.1
S$28  (1 unrouted)
  Top 0.61: E$2.B34 SJ27.1
S$29  (1 unrouted)
  Top 0.61: E$2.B36 SJ26.1
S$30  (1 unrouted)
  Top 0.61: E$2.B38 SJ25.1
S$31  (1 unrouted)
  Top 0.61: E$2.B41 SJ24.1
S$32  (1 unrouted)
  Top 0.61: E$2.B43 SJ23.1
S$33  (1 unrouted)
  Top 0.61: E$2.B45 SJ22.1
S$34  (1 unrouted)
  Bottom 0.61: E$1.B21 SJ21.1
S$35  (1 unrouted)
  Bottom 0.61: E$1.B19 SJ19.1
S$36  (1 unrouted)
  Bottom 0.61: E$1.B17 SJ37.1
S$37  (1 unrouted)
  Bottom 0.61: E$1.B24 SJ30.1
S$38  (1 unrouted)
  Bottom 0.61: E$1.B26 SJ29.1
S$39  (1 unrouted)
  Bottom 0.61: E$1.B28 SJ28.1
S$40  (1 unrouted)
  Bottom 0.61: E$1.B31 SJ36.1
S$41  (1 unrouted)
  Bottom 0.61: E$1.B33 SJ35.1
S$42  (1 unrouted)
  Bottom 0.61: E$1.B35 SJ34.1
S$43  (1 unrouted)
  Bottom 0.61: E$1.B38 SJ15.1
S$44  (1 unrouted)
  Bottom 0.61: E$1.B40 SJ8.1
S$45  (1 unrouted)
  Bottom 0.61: E$1.B42 SJ1.1
S$46  (1 unrouted)
  Bottom 0.61: E$1.B49 SJ9.1
S$47  (1 unrouted)
  Bottom 0.61: E$1.B47 SJ10.1
S$48  (1 unrouted)
  Bottom 0.61: E$1.B45 SJ11.1
S$49  (1 unrouted)
  Bottom 0.61: E$1.B52 SJ4.1
S$50  (1 unrouted)
  Bottom 0.61: E$1.B54 SJ3.1
S$51  (1 unrouted)
  Bottom 0.61: E$1.B56 SJ2.1
S$52  (via drill 0.51 pad 0.91)
  other vias: 33.27,97.28
S$53  (via drill 0.51 pad 0.91)  (2 unrouted)
  Top 0.61: v123.06,99.95 132.33,90.68 U6.2
  Bottom 0.61: SJ34.2 76.96,97.28 80.01,100.33 122.68,100.33 v123.06,99.95
S$54  (via drill 0.51 pad 0.91)  (2 unrouted)
  Top 0.61: U5.2 112.65,72.39 124.71,84.45 124.71,94.36 v120.4,98.68
  Bottom 0.61: SJ28.2 84.58,97.28 86.23,98.93 119.89,98.93 v120.4,98.68
S$55
  Bottom 0.61: 51.44,86.87 51.44,91.19
S$56  (via drill 0.41 pad 0.81)
  other vias: 38.73,89.92
S$57  (1 unrouted)
S$58  (1 unrouted)
S$59  (via drill 0.41 pad 0.81)
  other vias: 40.01,89.92
S$60  (1 unrouted)
S$61  (1 unrouted)
S$62  (1 unrouted)
S$63  (1 unrouted)
S$64  (1 unrouted)
S$65  (1 unrouted)
S$66  (via drill 0.41 pad 0.81)
  other vias: 41.27,89.92
S$67  (1 unrouted)
S$68  (1 unrouted)
S$69  (1 unrouted)
S$70  (1 unrouted)
S$71  (1 unrouted)
S$72  (1 unrouted)
S$73  (via drill 0.41 pad 0.81)
  other vias: 42.55,89.92
S$74  (1 unrouted)
S$75  (1 unrouted)
S$76  (1 unrouted)
S$77  (1 unrouted)
S$78  (1 unrouted)
S$79  (1 unrouted)
S$80  (via drill 0.41 pad 0.81)
  other vias: 43.81,89.92
S$81  (1 unrouted)
S$82  (1 unrouted)
S$83  (1 unrouted)
S$84  (1 unrouted)
S$85  (1 unrouted)
S$86  (1 unrouted)
S$87  (via drill 0.41 pad 0.81)
  other vias: 45.09,89.92
S$88  (1 unrouted)
S$89  (1 unrouted)
S$90  (1 unrouted)
S$91  (1 unrouted)
S$92  (1 unrouted)
S$93  (1 unrouted)
S$94  (via drill 0.41 pad 0.81)
  other vias: 46.35,89.92
S$95  (1 unrouted)
S$96  (1 unrouted)
S$97  (1 unrouted)
S$98  (1 unrouted)
S$99  (1 unrouted)
S$100  (1 unrouted)
S$101  (via drill 0.41 pad 0.81)
  other vias: 47.62,89.92
S$102  (1 unrouted)
S$103  (1 unrouted)
S$104  (1 unrouted)
S$105  (1 unrouted)
S$106  (1 unrouted)
S$107  (1 unrouted)
S$108  (via drill 0.41 pad 0.81)
  other vias: 48.9,89.92
S$109  (1 unrouted)
S$111  (1 unrouted)
S$112  (1 unrouted)
S$113  (1 unrouted)
S$114  (via drill 0.41 pad 0.81)
  other vias: 50.16,89.92
S$115  (via drill 0.41 pad 0.81)
  other vias: 51.44,89.92
S$116  (via drill 0.41 pad 0.81)
  other vias: 52.7,89.92
S$117  (1 unrouted)
  Top 0.61: E$2.B2 40.01,89.92
S$118  (via drill 0.41 pad 0.81)
  other vias: 53.98,89.92
S$119  (1 unrouted)
S$120  (via drill 0.41 pad 0.81)
  other vias: 55.24,89.92
S$121  (via drill 0.41 pad 0.81)
  other vias: 38.73,87.88
S$122  (via drill 0.41 pad 0.81)
  other vias: 40.01,87.88
S$123  (via drill 0.41 pad 0.81)
  other vias: 41.27,87.88
S$124  (via drill 0.41 pad 0.81)
  other vias: 42.55,87.88
S$125  (via drill 0.41 pad 0.81)
  other vias: 43.81,87.88
S$126  (1 unrouted)
S$127  (1 unrouted)
S$128  (1 unrouted)
S$129  (1 unrouted)
S$130  (1 unrouted)
S$131  (via drill 0.41 pad 0.81)
  other vias: 45.09,87.88
S$132  (1 unrouted)
S$133  (1 unrouted)
S$134  (via drill 0.41 pad 0.81)
  other vias: 46.35,87.88
S$135  (1 unrouted)
S$136  (1 unrouted)
S$137  (1 unrouted)
S$138  (via drill 0.41 pad 0.81)
  other vias: 47.62,87.88
S$139  (via drill 0.41 pad 0.81)
  other vias: 48.9,87.88
S$140  (via drill 0.41 pad 0.81)
  other vias: 50.16,87.88
S$141  (via drill 0.41 pad 0.81)
  other vias: 51.44,87.88
S$142  (via drill 0.41 pad 0.81)
  other vias: 52.7,87.88
S$143  (via drill 0.41 pad 0.81)
  other vias: 53.98,87.88
S$144  (via drill 0.41 pad 0.81)
  other vias: 55.24,87.88
S$145  (via drill 0.41 pad 0.81)
  other vias: 56.52,89.92
S$146  (via drill 0.41 pad 0.81)
  other vias: 57.78,89.92
S$147  (via drill 0.41 pad 0.81)
  other vias: 59.05,89.92
S$148  (via drill 0.41 pad 0.81)
  other vias: 60.33,89.92
S$149  (via drill 0.41 pad 0.81)
  other vias: 61.59,89.92
S$150  (via drill 0.41 pad 0.81)
  other vias: 62.87,89.92
S$151  (via drill 0.41 pad 0.81)
  other vias: 64.14,89.92
S$152  (via drill 0.41 pad 0.81)
  other vias: 65.41,89.92
S$153  (via drill 0.41 pad 0.81)
  other vias: 66.67,89.92
S$154  (via drill 0.41 pad 0.81)
  other vias: 67.94,89.92
S$155  (via drill 0.41 pad 0.81)
  other vias: 69.22,89.92
S$156  (via drill 0.41 pad 0.81)
  other vias: 70.48,89.92
S$157  (via drill 0.41 pad 0.81)
  other vias: 71.75,89.92
S$158  (via drill 0.41 pad 0.81)
  other vias: 73.03,89.92
S$159  (via drill 0.41 pad 0.81)
  other vias: 56.52,87.88
S$160  (via drill 0.41 pad 0.81)
  other vias: 57.78,87.88
S$161  (via drill 0.41 pad 0.81)
  other vias: 59.05,87.88
S$162  (via drill 0.41 pad 0.81)
  other vias: 60.33,87.88
S$163  (via drill 0.41 pad 0.81)
  other vias: 61.59,87.88
S$164  (via drill 0.41 pad 0.81)
  other vias: 62.87,87.88
S$165  (via drill 0.41 pad 0.81)
  other vias: 64.14,87.88
S$166  (via drill 0.41 pad 0.81)
  other vias: 65.41,87.88
S$167  (via drill 0.41 pad 0.81)
  other vias: 66.67,87.88
S$168  (via drill 0.41 pad 0.81)
  other vias: 67.94,87.88
S$169  (via drill 0.41 pad 0.81)
  other vias: 69.22,87.88
S$170  (via drill 0.41 pad 0.81)
  other vias: 70.48,87.88
S$171  (via drill 0.41 pad 0.81)
  other vias: 71.75,87.88
S$172  (via drill 0.41 pad 0.81)
  other vias: 73.03,87.88
S$173  (via drill 0.41 pad 0.81)
  other vias: 74.3,89.92
S$174  (via drill 0.41 pad 0.81)
  other vias: 75.56,89.92
S$175  (via drill 0.41 pad 0.81)
  other vias: 76.83,89.92
S$176  (via drill 0.41 pad 0.81)
  other vias: 78.11,89.92
S$177  (via drill 0.41 pad 0.81)
  other vias: 79.38,89.92
S$178  (via drill 0.41 pad 0.81)
  other vias: 80.64,89.92
S$179  (via drill 0.41 pad 0.81)
  other vias: 81.92,89.92
S$180  (via drill 0.41 pad 0.81)
  other vias: 83.19,89.92
S$181  (via drill 0.41 pad 0.81)
  other vias: 84.45,89.92
S$182  (via drill 0.41 pad 0.81)
  other vias: 85.72,89.92
S$183  (via drill 0.41 pad 0.81)
  other vias: 87,89.92
S$184  (via drill 0.41 pad 0.81)
  other vias: 88.27,89.92
S$185  (via drill 0.41 pad 0.81)
  other vias: 89.53,89.92
S$186  (via drill 0.41 pad 0.81)
  other vias: 90.81,89.92
S$187  (via drill 0.41 pad 0.81)
  other vias: 74.3,87.88
S$188  (via drill 0.41 pad 0.81)
  other vias: 75.56,87.88
S$189  (via drill 0.41 pad 0.81)
  other vias: 76.83,87.88
S$190  (via drill 0.41 pad 0.81)
  other vias: 78.11,87.88
S$191  (via drill 0.41 pad 0.81)
  other vias: 79.38,87.88
S$192  (via drill 0.41 pad 0.81)
  other vias: 80.64,87.88
S$193  (via drill 0.41 pad 0.81)
  other vias: 81.92,87.88
S$194  (via drill 0.41 pad 0.81)
  other vias: 83.19,87.88
S$195  (via drill 0.41 pad 0.81)
  other vias: 84.45,87.88
S$196  (via drill 0.41 pad 0.81)
  other vias: 85.72,87.88
S$197  (via drill 0.41 pad 0.81)
  other vias: 87,87.88
S$198  (via drill 0.41 pad 0.81)
  other vias: 88.27,87.88
S$199  (via drill 0.41 pad 0.81)
  other vias: 89.53,87.88
S$200  (via drill 0.41 pad 0.81)
  other vias: 90.81,87.88
S$201  (via drill 0.41 pad 0.81)
  other vias: 92.08,89.92
S$202  (via drill 0.41 pad 0.81)
  other vias: 93.34,89.92
S$203  (via drill 0.41 pad 0.81)
  other vias: 94.61,89.92
S$204  (via drill 0.41 pad 0.81)
  other vias: 95.89,89.92
S$205  (via drill 0.41 pad 0.81)
  other vias: 97.16,89.92
S$206  (via drill 0.41 pad 0.81)
  other vias: 98.42,89.92
S$207  (via drill 0.41 pad 0.81)
  other vias: 99.69,89.92
S$208  (via drill 0.41 pad 0.81)
  other vias: 100.97,89.92
S$209  (via drill 0.41 pad 0.81)
  other vias: 102.23,89.92
S$210  (via drill 0.41 pad 0.81)
  other vias: 103.5,89.92
S$211  (via drill 0.41 pad 0.81)
  other vias: 104.78,89.92
S$212  (via drill 0.41 pad 0.81)
  other vias: 106.05,89.92
S$213  (via drill 0.41 pad 0.81)
  other vias: 107.31,89.92
S$214  (via drill 0.41 pad 0.81)
  other vias: 108.58,89.92
S$215  (via drill 0.41 pad 0.81)
  other vias: 92.08,87.88
S$216  (via drill 0.41 pad 0.81)
  other vias: 93.34,87.88
S$217  (via drill 0.41 pad 0.81)
  other vias: 94.61,87.88
S$218  (via drill 0.41 pad 0.81)
  other vias: 95.89,87.88
S$219  (via drill 0.41 pad 0.81)
  other vias: 97.16,87.88
S$220  (via drill 0.41 pad 0.81)
  other vias: 98.42,87.88
S$221  (via drill 0.41 pad 0.81)
  other vias: 99.69,87.88
S$222  (via drill 0.41 pad 0.81)
  other vias: 100.97,87.88
S$223  (via drill 0.41 pad 0.81)
  other vias: 102.23,87.88
S$224  (via drill 0.41 pad 0.81)
  other vias: 103.5,87.88
S$225  (via drill 0.41 pad 0.81)
  other vias: 104.78,87.88
S$226  (via drill 0.41 pad 0.81)
  other vias: 106.05,87.88
S$227  (via drill 0.41 pad 0.81)
  other vias: 107.31,87.88
S$228  (via drill 0.41 pad 0.81)
  other vias: 108.58,87.88
S$229  (via drill 0.41 pad 0.81)
  other vias: 109.86,89.92
S$230  (via drill 0.41 pad 0.81)
  other vias: 111.12,89.92
S$231  (via drill 0.41 pad 0.81)
  other vias: 112.39,89.92
S$232  (via drill 0.41 pad 0.81)
  other vias: 113.67,89.92
S$233  (via drill 0.41 pad 0.81)
  other vias: 109.86,87.88
S$234  (via drill 0.41 pad 0.81)
  other vias: 111.12,87.88
S$235  (via drill 0.41 pad 0.81)
  other vias: 112.39,87.88
S$236  (via drill 0.41 pad 0.81)
  other vias: 113.67,87.88
S$242
  Bottom 0.61: 78.11,84.84 77.98,84.96

## Text on the board
tNames: MDA U of T, Motor and Peripheral Driver | February 2012